# Altium PCB pure_sinus.PcbDoc
Units mm, origin at the board's own origin, x right, y up, seen from the top; angles counter-clockwise.
Board outline 56.22 x 64.53 mm, 2 copper layers (Top Layer, Bottom Layer); 91 components, 60 nets, 314 pads, 56 vias.
Unrouted connection lines stored in the file: 8.
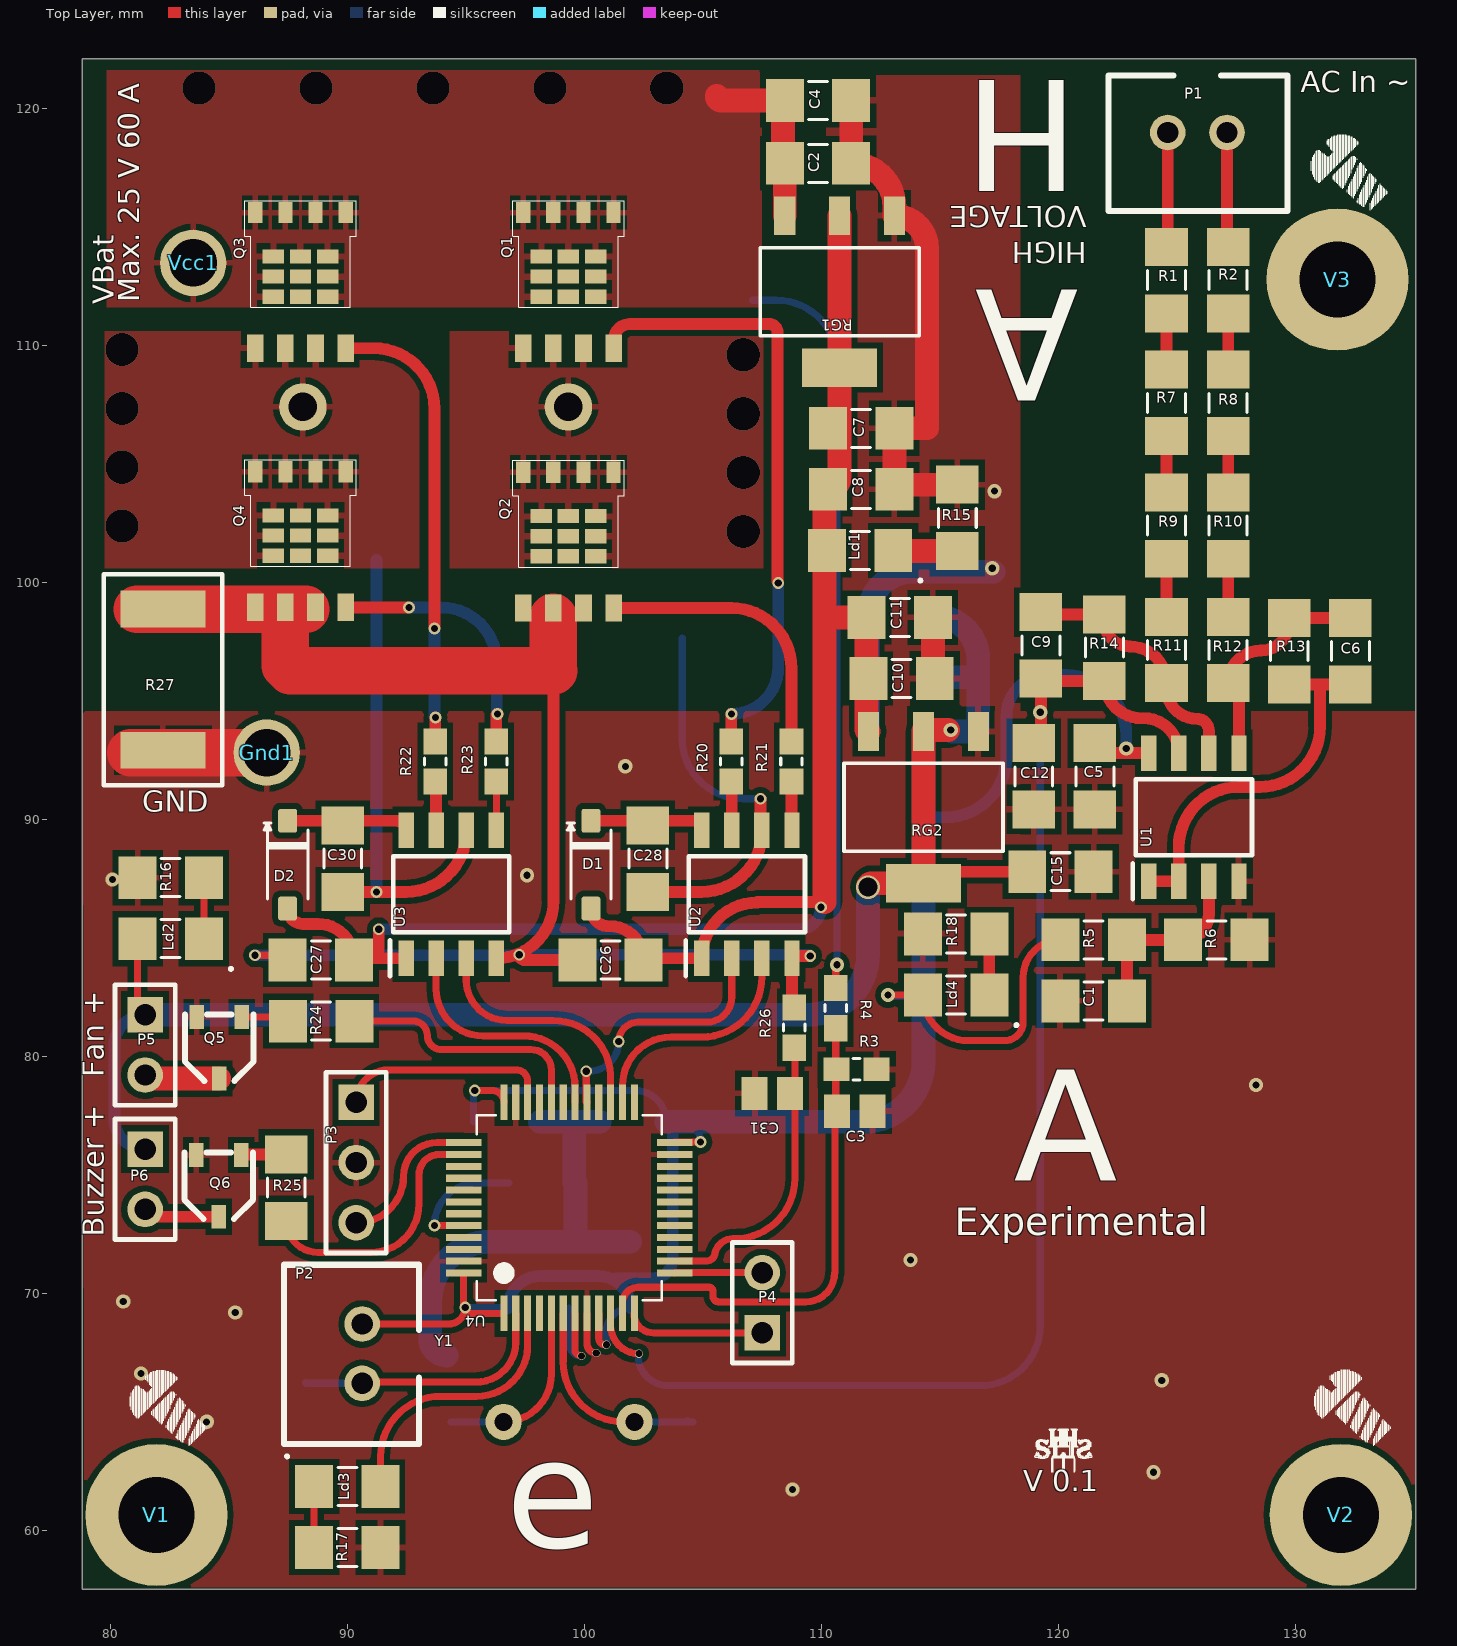
[diagram p0: Top Layer view]
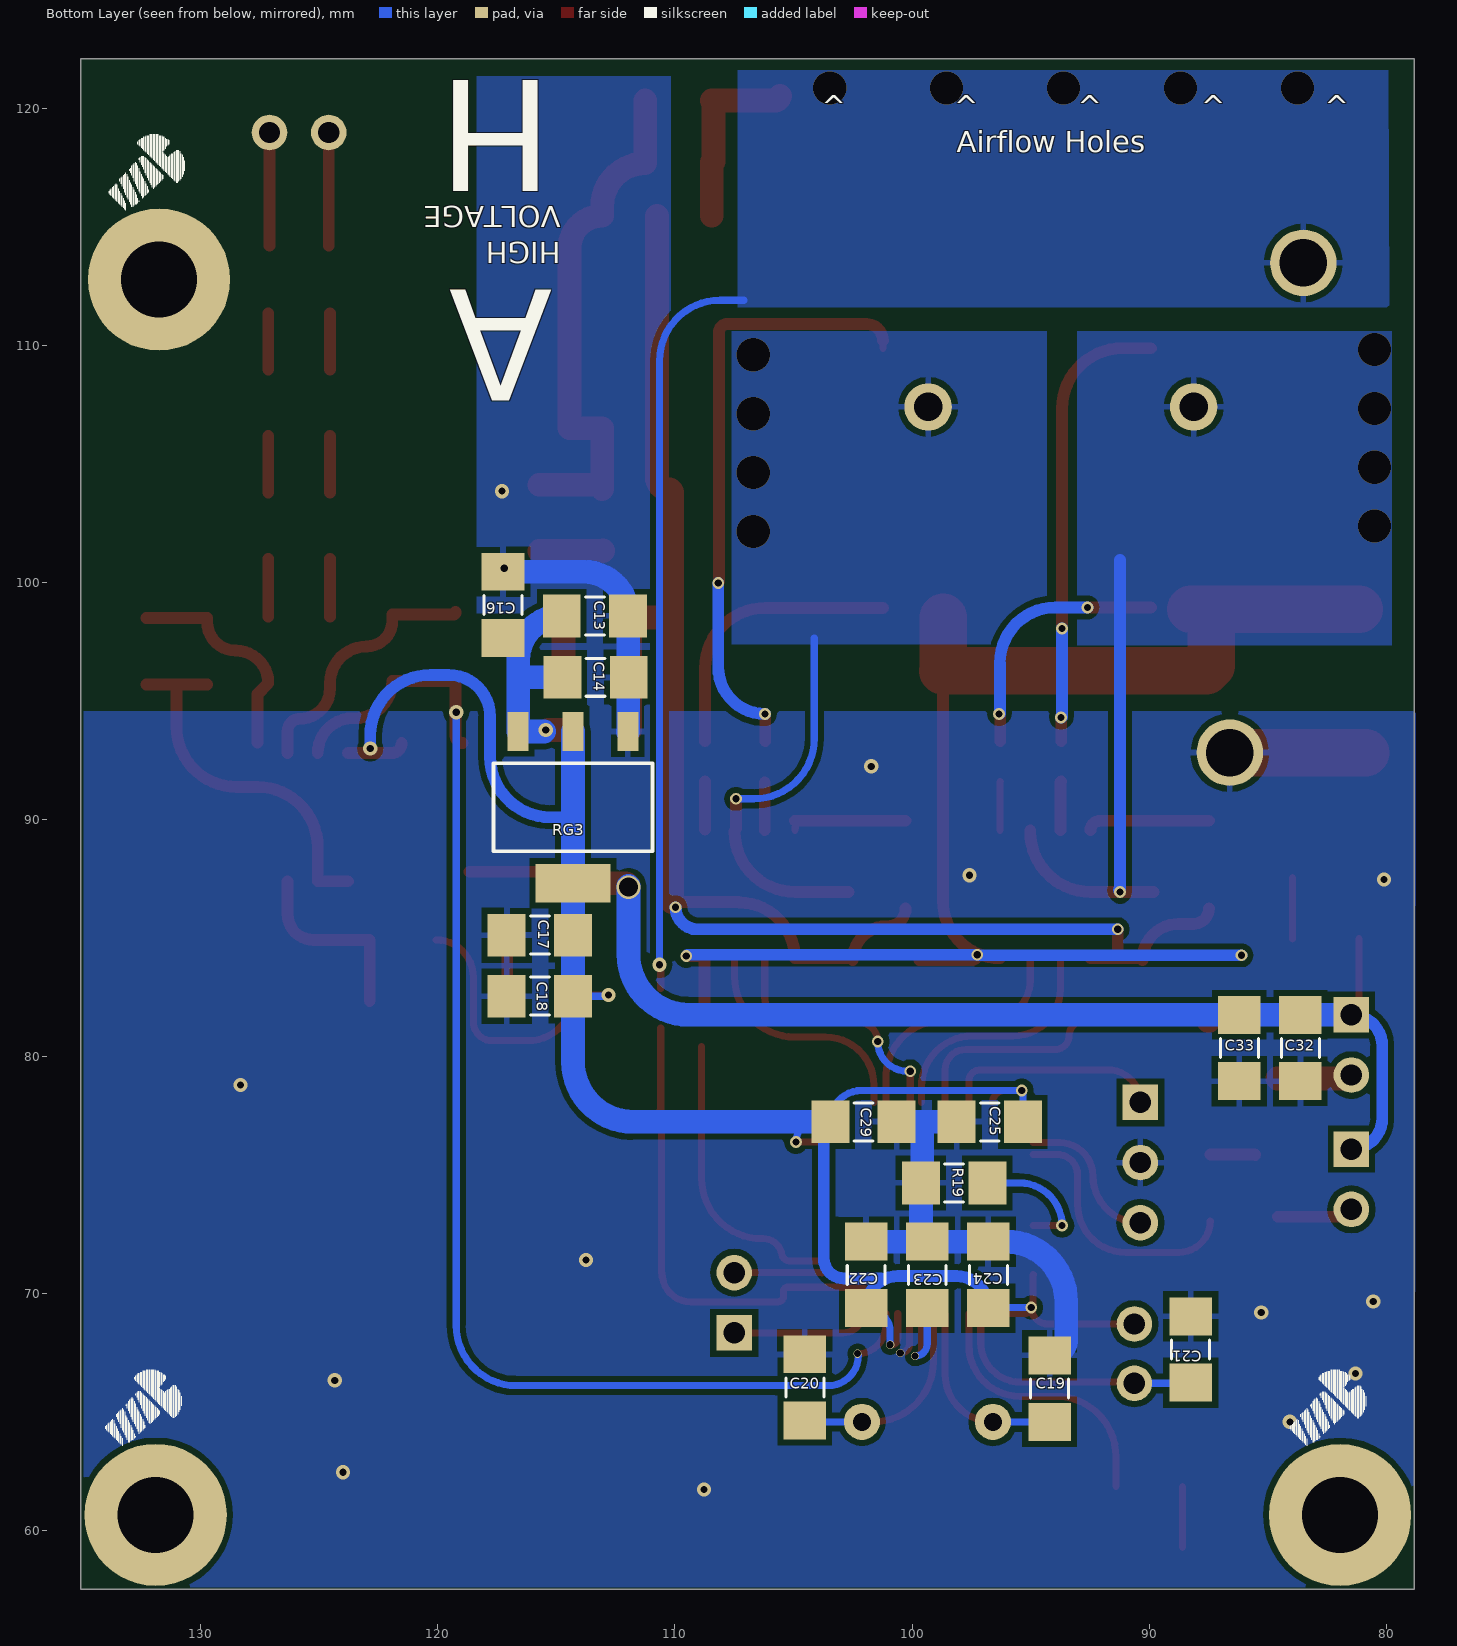
[diagram p1: Bottom Layer view, seen from below]

## Layer stack, top to bottom
Top Solder: solder mask 0.0102, Solder Resist, Dk 3.5
Top Layer: signal copper 0.0356
Dielectric 1: dielectric 0.32, FR-4, Dk 4.8
Bottom Layer: signal copper 0.0356
Bottom Solder: solder mask 0.0102, Solder Resist, Dk 3.5

## Board outline
78.825,57.55 135.05,57.55 135.05,122.075 78.825,122.075

## Design rules (kind name [scope] priority, off if disabled: settings)
Clearance [All] p1: gap=0.254 ignorepadtopadclearanceinfootprint=FALSE except(0: Arc-Hole Track-Hole SMDPad-Hole THPad-Hole Via-Hole Fill-Hole Poly-Hole Region-Hole Text-Hole)
HoleSize [All] p1: absolutevalues=TRUE maxlimit=4 minlimit=0.3 maxpercent=80.000 minpercent=20.000
MinimumSolderMaskSliver [All] p1: minsoldermaskwidth=0.1
PlaneConnect [All] p1: pad.planeconnectstyle=Relief pad.reliefexpansion=0.508 pad.reliefentries=4 pad.reliefconductorwidth=0.254 pad.reliefairgap=0.254 via.planeconnectstyle=Direct via.reliefexpansion=0.508 via.reliefentries=4 via.reliefconductorwidth=0.254 via.reliefairgap=0.254
PolygonConnect [All] p1: thpad.connectstyle=Relief thpad.reliefconductorwidth=0.254 thpad.reliefentries=4 thpad.polygonreliefangle="90 Angle" thpad.airgapwidth=0.254 smdpad.connectstyle=Relief smdpad.reliefconductorwidth=0.254 smdpad.reliefentries=4 smdpad.polygonreliefangle="90 Angle" smdpad.airgapwidth=0.254 via.connectstyle=Direct via.reliefconductorwidth=0.254 via.reliefentries=4 via.polygonreliefangle="90 Angle" via.airgapwidth=0.254
RoutingCorners [All] p1: cornerstyle=Round minsetback=2.54 maxsetback=2.54
RoutingVias [All] p1: holewidth=0.3 width=0.6 viastyle="Through Hole" minholewidth=0.3 minwidth=0.6 maxholewidth=0.711 maxwidth=1.27
SilkToSolderMaskClearance [IsPad] p1: minsilkscreentomaskgap=0.254 clearancetoexposedcopper=FALSE
SolderMaskExpansion [All] p1: expansion=0.102
UnRoutedNet [All] p1: checkbadconnections=TRUE
UnRoutedNet UnRoutedNet_1 [All] p2: checkbadconnections=TRUE
Width [All] p1: maxlimit=4 minlimit=0.3 preferedwidth=0.5 minimp=50.000000 maximp=50.000000 favimp=50.000000
24 further rules are at their usual default settings.

## Components (designator, comment, footprint, x,y, rotation, side; value= is the part's Value field where it differs from the comment)
C1 "4n7" 1206 121.475,82.35 r180 top
C2 "100nF" 1206 109.85,117.675 r180 top
C3 "4n7" C0805 111.4,77.7 r180 top
C4 "1uF" 1206 109.85,120.325 r180 top
C5 "100n" 1206 121.525,91.825 r270 top
C6 "4n7" 1206 132.3,97.1 r270 top
C7 "1uF" 1206 111.673,106.5 r180 top
C8 "100nF" 1206 111.673,103.925 r180 top
C9 "4n7" 1206 119.25,97.35 r90 top
C10 "100nF" 1206 113.375,95.95 r180 top
C11 "1uF" 1206 113.3,98.525 r180 top
C12 "4n7" 1206 118.95,91.825 r90 top
C13 "1uF" 1206 113.375,98.587 r0 bottom
C14 "100nF" 1206 113.35,96 r0 bottom
C15 "100nF" 1206 120.075,87.8 r180 top
C16 "1uF" 1206 117.25,99.05 r270 bottom
C17 "1uF" 1206 115.7,85.125 r180 bottom
C18 "100nF" 1206 115.7,82.55 r180 bottom
C19 "20pF" 1206 94.2,66 r90 bottom
C20 "20pF" 1206 104.525,66.05 r270 bottom
C21 "100nF" 1206 88.25,67.65 r270 bottom
C22 "1uF" 1206 101.935,70.8 r90 bottom
C23 "100nF" 1206 99.36,70.8 r270 bottom
C24 "100nF" 1206 96.785,70.8 r270 bottom
C25 "100nF" 1206 96.725,77.25 r180 bottom
C26 "Cap" 1206 101.1,84.075 r0 top
C27 "Cap" 1206 88.883,84.075 r0 top
C28 "Cap" 1206 102.675,88.35 r90 top
C29 "100nF" 1206 102.05,77.25 r0 bottom
C30 "Cap" 1206 89.808,88.35 r90 top
C31 "100nF" C0805 107.925,78.45 r180 top
C32 "100nF" 1206 83.625,80.365 r90 bottom
C33 "1uF" 1206 86.2,80.365 r90 bottom
D1 "Diode 1N4004" SOD123 100.275,88.1 r270 top
D2 "Diode 1N4004" SOD123 87.483,88.1 r270 top
Gnd1 "M2_pad" M2_Pad 86.6,92.825 r90 top
Ld1 "Mavi" L1206 111.625,101.35 r180 top
Ld2 "Yeşil" L1206 82.553,84.975 r180 top
Ld3 "Sarı" L1206 90,61.875 r0 top
Ld4 "Kırmızı" L1206 115.675,82.6 r180 top
P1 "Header 2" 2p_fml 125.85,118.975 r180 top
P2 "Header 2" 2p_fml 90.625,67.475 r90 top
P3 "Header 3" HDR1X3 90.375,78.075 r270 top
P4 "Header 2" HDR1X2 107.5,68.35 r90 top
P5 "DcFan" HDR1X2 81.475,81.765 r270 top
P6 "Buzzer" HDR1X2 81.475,76.1 r270 top
Q1 "psmn6r5-25" power-so8 99.325,112.6 r0 top
Q2 "psmn6r5-25" power-so8 99.325,101.65 r0 top
Q3 "psmn6r5-25" power-so8 88.025,112.6 r0 top
Q4 "psmn6r5-25" power-so8 88.025,101.675 r0 top
Q5 "BC817" SOT23 84.475,80.25 r0 top
Q6 "BC817" SOT23 84.45,74.425 r0 top
R1 "250k" 1206 124.55,112.75 r270 top
R2 "250k" 1206 127.15,112.75 r270 top
R3 "3k3" 0603 111.475,79.475 r180 top
R4 "8k7" 0603 110.6,82.05 r90 top
R5 "2k2" 1206 121.475,84.925 r180 top
R6 "2k2" 1206 126.65,84.925 r180 top
R7 "250k" 1206 124.55,107.575 r270 top
R8 "250k" 1206 127.15,107.575 r270 top
R9 "250k" 1206 124.55,102.4 r270 top
R10 "250k" 1206 127.15,102.4 r270 top
R11 "250k" 1206 124.55,97.15 r270 top
R12 "250k" 1206 127.15,97.15 r270 top
R13 "4k1" 1206 129.725,97.1 r270 top
R14 "4k1" 1206 121.925,97.25 r90 top
R15 "5k" 1206 115.725,102.725 r90 top
R16 "2.2k" 1206 82.553,87.55 r180 top
R17 "1k" 1206 90,59.3 r0 top
R18 "1k" 1206 115.675,85.175 r180 top
R19 "1k" 1206 98.225,74.675 r0 bottom
R20 "10R" 0603 106.19,92.45 r90 top
R21 "10R" 0603 108.73,92.45 r90 top
R22 "10R" 0603 93.708,92.45 r90 top
R23 "10R" 0603 96.283,92.45 r90 top
R24 "10R" 1206 88.9,81.5 r180 top
R25 "2k2" 1206 87.425,74.475 r90 top
R26 "2K2" 0603 108.855,81.225 r270 top
R27 "Şönt 0.01 Ohm 3W" Shont_2512 82.225,95.9 r270 top
RG1 "LM1117-12v" SOT-223 110.761,112.275 r270 top
RG2 "LM1117-5v" SOT-223 114.3,90.525 r270 top
RG3 "LM1117-3v3" SOT-223 114.3,90.525 r270 bottom
U1 "MCP6022" SOP-8L 125.7,90.1 r90 top
U2 "IR2301" SOP-8L 106.85,86.85 r90 top
U3 "IR2301" SOP-8L 94.383,86.85 r90 top
U4 "STM32F103C8T6" LQFP48 99.355,73.6 r90 top
V1 "M3_Vida" M3_Vida 81.95,60.671 r0 top
V2 "M3_Vida" M3_Vida 131.9,60.675 r0 top
V3 "M3_Vida" M3_Vida 131.76,112.775 r0 top (schematic designator V2)
Vcc1 "M2_pad" M2_Pad 83.5,113.475 r90 top
Y1 "8MHz" xtal 104.88,66.925 r180 top

## Footprints (in the part's own frame and the unit in brackets; to place one, negate y for a bottom-side part, rotate by r counter-clockwise, add the part's x,y. Pads: shape width x height; smd on the part's side, far side on the other; paste and mask are expansions set on the pad)
2p_fml [mm]
  round 1.5 hole 0.9: 1(-1.25,0) 2(1.25,0)
  silkscreen extent -3.81,-2.4 3.75,3.3
0603 [mm]
  rect 1.1x1 smd: 1(-0.85,0) 2(0.85,0)
  silkscreen extent -0.15,-0.45 0.15,0.45
1206 [mm]
  rect 1.6x1.8 smd: 1(-1.4,0) 2(1.4,0)
  silkscreen extent -0.4,-0.8 0.4,0.8
C0805 [mm] "Chip Capacitor, Body 2.0x1.3mm, IPC High Density"
  rect 1.1x1.4 smd: 1(-0.75,0) 2(0.75,0)
  body extent -1.1,-0.72 1.1,0.72, height 1.4
HDR1X2 [mm] "Connector; Header; 2 Position"
  rect 1.5x1.5 hole 0.9: 1(0,0)
  round 1.5 hole 0.9: 2(2.54,0)
  silkscreen extent -1.27,-1.27 3.81,1.27
HDR1X3 [mm] "Connector; Header; 3 Position"
  rect 1.5x1.5 hole 0.9: 1(0,0)
  round 1.5 hole 0.9: 2(2.54,0) 3(5.08,0)
  silkscreen extent -1.27,-1.27 6.35,1.27
L1206 [mm]
  rect 1.6x1.8 smd: 1(-1.4,0) 2(1.4,0)
  silkscreen extent -2.6,-0.8 0.4,1.33
LQFP48 [mm]
  rect 1.5x0.3 smd: 1(-4.425,2.75) 2(-4.425,2.25) 3(-4.425,1.75) 4(-4.425,1.25) 5(-4.425,0.75) 6(-4.425,0.25) 7(-4.425,-0.25) 8(-4.425,-0.75) 9(-4.425,-1.25) 10(-4.425,-1.75) 11(-4.425,-2.25) 12(-4.425,-2.75) 25(4.475,-2.75) 26(4.475,-2.25) 27(4.475,-1.75) 28(4.475,-1.25) 29(4.475,-0.75) 30(4.475,-0.25) 31(4.475,0.25) 32(4.475,0.75) 33(4.475,1.25) 34(4.475,1.75) 35(4.475,2.25) 36(4.475,2.75)
  rect 0.3x1.5 smd: 13(-2.725,-4.45) 14(-2.225,-4.45) 15(-1.725,-4.45) 16(-1.225,-4.45) 17(-0.725,-4.45) 18(-0.225,-4.45) 19(0.275,-4.45) 20(0.775,-4.45) 21(1.275,-4.45) 22(1.775,-4.45) 23(2.275,-4.45) 24(2.775,-4.45) 37(2.775,4.45) 38(2.275,4.45) 39(1.775,4.45) 40(1.275,4.45) 41(0.775,4.45) 42(0.275,4.45) 43(-0.225,4.45) 44(-0.725,4.45) 45(-1.225,4.45) 46(-1.725,4.45) 47(-2.225,4.45) 48(-2.725,4.45)
  silkscreen extent -3.87,-3.9 3.93,3.9
M2_Pad [mm]
  round 2.8 hole 2: 1(0,0)
M3_Vida [mm]
  round 6 hole 3.2: 0(0,0)
  silkscreen extent -1.1,2.91 2.1,6.11
power-so8 [mm]
  rect 0.7x1.15 smd: 1(-1.905,-2.725) 2(-0.635,-2.725) 3(0.635,-2.725) 4(1.905,-2.725)
  rect 0.6x0.9 smd: 5(1.905,3) 6(0.635,3) 7(-0.635,3) 8(-1.905,3)
  rect 0.9x0.6 smd: 6(-1.15,-0.55) 6(-1.15,0.3) 6(-1.15,1.15) 6(0,-0.55) 6(0,0.3) 6(0,1.15) 6(1.15,-0.55) 6(1.15,0.3) 6(1.15,1.15)
  silkscreen extent -2.35,-1 2.35,3.5
Shont_2512 [mm]
  rect 1.55x3.6 smd: 1(-2.975,0) 2(2.975,0)
  silkscreen extent -4.45,-2.5 4.45,2.5
SOD123 [mm] "SOD-123; 2 Leads; Body 2.7 x 1.6 mm, (LxW)"
  round 0.508 on Mech15: 0(0,0)
  rrect25% 1x0.8 smd: 1(1.85,0) 2(-1.85,0)
  silkscreen extent -1.75,-1 1.45,0.85, body extent -1.95,-0.9 1.95,0.9, height 1.18
SOP-8L [mm] "AP1509-50SG-13"
  rect 1.5x0.65 smd: 1(-2.7,1.905) 2(-2.7,0.635) 3(-2.7,-0.635) 4(-2.7,-1.905) 5(2.7,-1.905) 6(2.7,-0.635) 7(2.7,0.635) 8(2.7,1.905)
  silkscreen extent -3.45,-2.45 1.6,2.58
SOT23 [mm]
  rect 0.6x1 smd: 1(1.077,1.427) 2(-0.823,1.427) 3(0.127,-1.173)
  silkscreen extent -1.32,-1.27 1.58,1.53, body extent -1.32,-1.27 1.58,1.53, height 1.3
SOT-223 [mil]
  rect 64x35 smd: 1(-125.5,91) 2(-125.5,0) 3(-125.5,-91)
  rect 64x125 smd: 4(126.5,0)
  silkscreen extent -73,-132 74,132, body extent 110,-10 110,-10, height 10
xtal [mil]
  round 60 hole 30: 1(108.74,91.54) 2(326.26,91.54)

## Part data
C1 C2 C3 C4 C5 C6 C7 C8 C9 C10 C11 C12 C13 C14 C15 C16 C17 C18 C19 C20 C21 C22 C23 C24 C25 C29 C31 C32 C33: library part Cap
D1 D2: "1 Amp General Purpose Rectifier", Code_JEDEC=DO-204-AL, ComponentLink1Description="Manufacturer Link", ComponentLink1URL=http://www.fairchildsemi.com/, ComponentLink2Description=Datasheet, ComponentLink2URL=http://www.fairchildsemi.com/ds/1N%2F1N4001.pdf, DatasheetVersion=1998, LatestRevisionDate=17-Jul-2002, LatestRevisionNote="Re-released for DXP Platform.", PackageDescription="Diode, Axial; Body 5.2 x 2.7 mm (LxDia. max), Lead Dia. 0.86 mm (max)", PackageReference=DO-41, PackageVersion=Aug-1999, Published=8-Jun-2000, Publisher="Altium Limited"
Ld1 Ld2 Ld3 Ld4: library part Led
P1 P2 P4: "Header, 2-Pin", LatestRevisionDate=17-Jul-2002, LatestRevisionNote="Re-released for DXP Platform.", Publisher="Altium Limited"
P3: "Header, 3-Pin", LatestRevisionDate=17-Jul-2002, LatestRevisionNote="Re-released for DXP Platform.", Publisher="Altium Limited"
P5 P6: library part "Header 2", "Header, 2-Pin", LatestRevisionDate=17-Jul-2002, LatestRevisionNote="Re-released for DXP Platform.", Publisher="Altium Limited"
Q5 Q6: "45 V, 500 mA NPN general-purpose transistors", Supplier Part Number 1=1459035RL, Supplier 1=Farnell
R1 R2 R3 R4 R5 R6 R7 R8 R9 R10 R11 R12 R13 R14 R15 R16 R17 R18 R19 R20 R21 R22 R23 R24 R25 R26: library part Resistor
R27: library part Resistor, "0.01 Ohm / 3W"
RG1 RG2 RG3: library part LM1117
Y1: library part Xtal

## Free pads (board coordinates)
  round 2 hole 1.2: 7(88.125,107.4) M1(99.325,107.4)

## Via types
v1: diameter 0.6, hole 0.3, Top Layer to Bottom Layer, tented both sides, 19 vias
v2: diameter 0.5, hole 0.3, Top Layer to Bottom Layer, tented both sides, 19 vias
v3: diameter 1.4, hole 1.4, Top Layer to Bottom Layer, tented both sides, 13 vias
v4: diameter 0.35, hole 0.3, Top Layer to Bottom Layer, tented both sides, 4 vias
v5: diameter 1, hole 0.8, Top Layer to Bottom Layer, tented both sides, 1 vias

## Nets (pads, with @x,y where several pads share a name; then routed paths per layer and width w, separated by ;. In a path a pad name is that pad's centre, name@x,y a point inside that pad or via, vN(x,y) a via of type N, cw(c..) or ccw(c..) an arc to the next point about the centre after c; other vN are vias at no path point)
+1.65: C6.2 R13.2 U1.1 U1.2 | length 15.9
  Top Layer w0.5: U1.1 U1.2 125.065,88.835 cw(c127.605,88.835) 127.605,91.375 128.485,91.375 ccw(c128.485,93.915) 131.025,93.915 131.025,95.7 ; R13.2 131.025,95.7 ; C6.2 131.025,95.7
+3.3: C5.1 C17.2 C18.2 C22.1 C24.2 C25.2 C29.2 Ld4.2 P2.2 R5.2 RG3.2 RG3.4 U1.8 U4.1 U4.9 U4.24 U4.36 U4.48 | length 99.6
  Top Layer w0.3: P2.2 94.275,68.725 ccw(c94.275,69.425) v2(94.975,69.425) ; U4.48@94.875,70.791 cw(c94.905,70.791) 94.905,70.821 94.905,69.495 ccw(c94.975,69.495) v2(94.975,69.425) ; v2(95.375,78.575) 96.105,78.575 cw(c96.105,78.075) U4.36 ; U4.1@96.551,69.175 95.225,69.175 cw(c95.225,69.425) v2(94.975,69.425) ; U4.9 100.605,68.12 ccw(c100.875,68.12) v4@100.875,67.85 ; U4.24 cw(c103.83,76.375) 103.83,76.4 v2(104.9,76.4) ; v1(112.8,82.6) Ld4.2 ccw(c116.2,82.6) 116.2,80.675 117.714,80.675 ccw(c117.714,81.461) 118.5,81.461 118.5,83.35 cw(c120.075,83.35) R5.2
  Top Layer w0.5: C5.1 ccw(c121.95,93.225) 121.95,92.8 U1.8
  Bottom Layer w0.3: v2(94.975,69.425) 96.76,69.425 cw(c96.76,69.4) C24.2 ; C25.2 95.325,78.525 cw(c95.375,78.525) v2(95.375,78.575) 102.125,78.575 cw(c102.125,77.25) C29.2 ; v4@100.925,67.855 100.925,68.39 cw(c101.935,68.39) C22.1 ; C29.2@104.05,77.25 cw(c104.05,76.4) v2(104.9,76.4) ; v1(112.8,82.6) 112.85,82.55 C18.2
  Bottom Layer w0.5: C24.2 cw(c98.135,69.4) 98.135,70.75 100.585,70.75 cw(c100.585,69.4) C22.1 ; 101.325,70.65 102.875,70.65 ccw(c102.875,71.5) 103.725,71.5 103.725,76.975 ccw(c103.45,76.975) C29.2 ; 114.3,90.1 115.256,90.1 ccw(c115.256,92.64) 117.796,92.64 117.796,94.35 cw(c119.546,94.35) 119.546,96.1 120.31,96.1 cw(c120.31,93.56) 122.85,93.56 v1(122.85,93)
  Bottom Layer w1: C29.2 104.05,77.25 111.76,77.25 ccw(c111.76,79.79) 114.3,79.79 C18.2 C17.2 RG3.4 114.3,90.1 RG3.2
  other v4: 100.925,67.85
+5: C13.2 C14.2 C15.2 C16.2 C32.2 C33.2 Ld2.2 P5.1 P6.1 RG2.2 RG2.4 RG3.3 | length 68.8
  Top Layer w0.3: Ld2.2 81.153,82.087 ccw(c81.475,82.087) P5.1
  Top Layer w0.5: RG2.4 cw(c114.788,87.312) 114.788,87.8 C15.2
  Top Layer w1: v5(111.958,87.15) cw(c112.12,87.15) 112.12,87.312 RG2.4 RG2.2 cw(c114.362,93.713) 114.362,93.775 v1@115.35,93.775
  Bottom Layer w0.5: P6.1 cw(c81.475,77.4) 80.175,77.4 80.175,80.465 cw(c81.475,80.465) P5.1
  Bottom Layer w1: P5.1 C32.2 C33.2 109.418,81.765 ccw(c109.418,84.305) 111.958,84.305 v5(111.958,87.15) v5@111.958,87.2 ; C14.2 116.586,96 cw(c116.586,95.975) 116.611,95.975 ; C13.2 cw(c114.775,96.75) 116.611,96.75 116.611,95.975 ; v1@115.512,93.713 RG3.3 116.611,95.975
  other v1: 115.45,93.775
+12: C7.2 C8.2 C10.2 C11.2 C26.2 C27.2 D1.1 D2.1 Ld1.2 RG1.2 RG1.4 RG2.3 U2.1 U3.1 | length 75.3
  Top Layer w0.5: D2.1 ccw(c88.133,86.25) 88.133,85.6 88.758,85.6 cw(c88.758,84.075) C27.2 cw(c90.358,84.075) 90.358,84.15 91.325,84.15 ; v2(91.325,85.375) 91.325,84.15 ; U3.1 91.325,84.15 ; D1.1 ccw(c101.025,86.25) 101.025,85.5 101.075,85.5 cw(c101.075,84.075) C26.2 cw(c102.575,84.075) 102.575,84.15 U2.1 cw(c107.295,84.15) 107.295,86.5 cw(c107.32,86.5) 107.32,86.525 110.125,86.525
  Top Layer w1: 110.125,86.525 110.125,98.525 ; RG1.2 RG1.4 110.761,104.414 cw(c110.273,104.414) C8.2 ccw(c110.273,103.777) 110.125,103.777 110.125,98.525 ; RG2.3 cw(c111.989,93.801) 111.9,93.801 C11.2 110.125,98.525
  Bottom Layer w0.5: v2(91.325,85.375) 109.25,85.375 ; 109.05,85.375 ccw(c109.05,86.3) v2(109.975,86.3)
+Vbat: C2.2 C4.2 Q1.5 Q1.6 Q1.7 Q1.8 Q3.5 Q3.6 Q3.7 Q3.8 R4.2 RG1.3 Vcc1.1 | length 39.5
  Top Layer w0.3: R4.2@110.6,82.88 R4.2 v1@110.6,83.825 ; v1@110.6,83.9 v1@110.6,83.825 ; v1(110.65,83.875) ccw(c110.65,83.825) v1@110.6,83.825
  Top Layer w1: 105.575,120.525 ccw(c105.775,120.525) 105.775,120.325 C4.2 ccw(c108.45,120.25) 108.375,120.25 108.375,117.75 cw(c108.375,117.675) C2.2 RG1.3
  Bottom Layer w0.3: 107.1,111.9 108.107,111.9 cw(c108.107,109.36) 110.647,109.36 v1@110.647,83.9
  other v3: 83.75,120.85 88.681,120.85 93.613,120.85 98.544,120.85 103.475,120.85
"Ac Out": C9.1 C12.2 R14.1 U1.7 U4.10 | length 57.9
  Top Layer w0.3: U4.10 101.105,68.67 ccw(c102.3,68.67) v4(102.3,67.475)
  Top Layer w0.5: C12.2 ccw(c118.95,93.525) 119.25,93.525 C9.1 ccw(c119.35,95.95) 119.35,95.85 R14.1 ccw(c123.5,95.85) 123.5,94.275 123.59,94.275 cw(c123.59,92.8) U1.7
  Bottom Layer w0.3: v4@102.267,67.4 ccw(c103.542,67.4) 103.542,66.125 116.685,66.125 ccw(c116.685,68.665) 119.225,68.665 v1(119.225,94.525)
Blt_Rst: U4.41
Blt_Rx: U4.43
Blt_Tx: U4.42
Buzzer: R25.1 U4.38 | length 11.1
  Top Layer w0.3: R25.1 ccw(c88.752,73.075) 88.752,71.748 90.996,71.748 ccw(c90.996,73.775) 93.023,73.775 93.023,75.02 cw(c93.878,75.02) 93.878,75.875 U4.38
Ch1: U2.2 U4.29 | length 10.9
  Top Layer w0.3: v2(100.077,79.385) 100.077,78.103 ccw(c100.105,78.103) U4.29 ; v2(101.447,80.635) cw(c102.267,80.635) 102.267,81.455 105.15,81.455 ccw(c105.15,82.52) 106.215,82.52 U2.2
  Bottom Layer w0.3: v2(100.077,79.385) 100.197,79.385 ccw(c100.197,80.635) v2(101.447,80.635)
Ch1N: U2.3 U4.26 | length 10
  Top Layer w0.3: U4.26 101.605,78.786 cw(c103.644,78.786) 103.644,80.825 104.945,80.825 ccw(c104.945,83.365) 107.485,83.365 U2.3
Ch2: U3.2 U4.30 | length 10.2
  Top Layer w0.3: U3.2 93.748,82.852 ccw(c95.725,82.852) 95.725,80.875 97.45,80.875 cw(c97.45,78.72) 99.605,78.72 U4.30
Ch2N: U3.3 U4.27 | length 10.3
  Top Layer w0.3: 95.018,83.234 ccw(c96.727,83.234) 96.727,81.525 98.7,81.525 cw(c98.7,79.12) 101.102,79.24 cw(c98.7,79.12) 101.105,79.12 U4.27 ; 95.018,83.309 U3.3
FanPwm: R24.1 U4.32 | length 10.8
  Top Layer w0.3: R24.1 92.775,81.5 cw(c92.775,80.9) 93.375,80.9 ccw(c93.975,80.9) 93.975,80.3 97.75,80.3 cw(c97.75,79.445) 98.605,79.445 U4.32
GND: C1.2 C2.1 C3.1 C4.1 C5.2 C7.1 C8.1 C10.1 C11.1 C12.1 C13.1 C14.1 C15.1 C16.1 C17.1 C18.1 C19.2 C20.1 C21.1 C22.2 C23.1 C24.1 C25.1 C29.1 C31.2 C32.1 C33.1 Gnd1.1 P3.2 Q5.2 Q6.2 R3.1 R6.1 R15.2 R16.2 R17.2 R18.2 R19.2 R27.2 RG1.1 RG2.1 RG3.1 U1.4 U4.8 U4.23 U4.35 U4.47 | length 64.1
  Top Layer w0.3: U4.8 100.105,67.895 ccw(c100.5,67.895) v4(100.5,67.5)
  Top Layer w1: C4.1 C2.1 cw(c111.25,115.852) 113.073,115.852 RG1.1 cw(c113.073,114.086) 114.45,114.086 114.45,106.5 C7.1 C8.1 cw(c113.273,103.925) 113.273,104.125 R15.2 ; C11.1 114.7,96.025 ccw(c114.775,96.025) C10.1
  Top Layer w2: R27.2@80.875,92.825 Gnd1.1
  Bottom Layer w1: C19.2 cw(c94.2,68.1) 93.5,68.1 93.5,69.66 cw(c96.04,69.66) 96.04,72.2 C24.1 C23.1 ; C25.1 99.575,77.25 ; C29.1 99.575,77.25 ; C22.2 C23.1 ; RG3.1 111.975,93.713 C13.1 cw(c113.838,98.587) 113.838,100.45 C16.1 ; C23.1 ccw(c99.36,72.465) 99.625,72.465 R19.2 cw(c99.625,74.725) 99.575,74.725 99.575,77.25
  other v1: 108.775,61.75 124,62.475 84.069,64.6 124.35,66.35 81.3,66.637 85.275,69.215 80.55,69.675 113.75,71.425 128.325,78.8 80.099,87.475 97.583,87.65 101.725,92.243 117.2,100.6 117.3,103.85
I_Dc: C31.1 R26.2 U4.14 | length 12.7
  Top Layer w0.3: U4.14 105.134,71.375 ccw(c105.134,71.748) 105.479,71.608 ; 105.507,71.748 cw(c105.134,71.748) 105.479,71.608 ; R26.2@108.875,80.425 108.875,74.865 cw(c106.335,74.865) 106.335,72.325 106.275,72.325 ccw(c106.275,71.525) 105.479,71.608
NetC1_1: C1.1 R5.1 R6.2 U1.3 | length 8
  Top Layer w0.5: C1.1 R5.1 R6.2 ccw(c125.25,86.01) 126.335,86.01 U1.3
NetC6_1: C6.1 R12.2 R13.1 U1.5 | length 9.5
  Top Layer w0.5: U1.5@127.605,93.25 127.605,95.295 R12.2 cw(c128.525,95.75) 128.525,97.125 ccw(c128.525,98.325) 129.725,98.325 R13.1 C6.1
NetC9_2: C9.2 R11.2 R14.2 U1.6 | length 11.1
  Top Layer w0.5: C9.2 ccw(c119.35,98.75) 119.35,98.65 R14.2 121.925,98.375 ccw(c123,98.375) 123,97.3 cw(c123,95.75) R11.2 124.55,95.525 ccw(c125.825,95.525) 125.825,94.25 cw(c125.825,93.74) 126.335,93.74 U1.6
NetC19_1: C19.1 U4.5 Y1.2 | length 7.9
  Top Layer w0.3: Y1.2 ccw(c96.593,66.612) 98.605,66.612 U4.5
  Bottom Layer w0.3: C19.1@94.375,64.6 Y1.2
NetC20_2: C20.2 U4.6 Y1.1 | length 9
  Top Layer w0.3: U4.6 99.105,67.14 ccw(c101.645,67.14) 101.645,64.6 Y1.1
  Bottom Layer w0.3: Y1.1 C20.2@104.3,64.6 ; C20.2@104.35,64.65 cw(c104.3,64.65) C20.2@104.3,64.6 ; C20.2@104.575,64.6 C20.2@104.3,64.6
NetC23_2: C23.2 U4.7 | length 4.2
  Top Layer w0.3: U4.7 99.605,67.62 ccw(c99.825,67.62) v4@99.825,67.4
  Bottom Layer w0.3: C23.2 99.36,67.89 ccw(c99.875,67.89) v4(99.875,67.375)
NetC28_1: C28.1 pad.M1 Q1.1 Q1.2 Q1.3 Q2.5 Q2.6 Q2.7 Q2.8 U2.6 | length 16.7
  Top Layer w0.3: U2.6@107.425,89.61 ccw(c107.485,89.61) U2.6 U2.6@107.485,89.49
  Top Layer w0.5: C28.1 104.945,86.95 ccw(c104.945,89.49) U2.6@107.485,89.49 ; U2.6@107.425,89.61 v2(107.425,90.877)
  Bottom Layer w0.3: 104.125,97.65 104.125,93.417 ccw(c106.665,93.417) 106.665,90.877 v2(107.425,90.877)
  other v3: 106.7,102.15 106.7,104.633 106.7,107.117 106.7,109.6
NetC28_2: C28.2 D1.2 U2.8 | length 5.3
  Top Layer w0.3: 104.545,89.95 cw(c104.545,89.55) U2.8
  Top Layer w0.5: D1.2 104.545,89.95 U2.8@104.95,89.95
NetC30_1: C30.1 pad.7 Q3.1 Q3.2 Q3.3 Q4.5 Q4.6 Q4.7 Q4.8 U3.6 | length 20.7
  Top Layer w0.5: C30.1 v2(91.225,86.95) 92.478,86.95 ccw(c92.478,89.49) 95.018,89.49 U3.6
  Bottom Layer w0.5: 91.225,100.952 91.225,87.075 v2@91.275,87.025
  other v3: 80.5,102.375 80.5,104.858 80.5,107.342 80.5,109.825
NetC30_2: C30.2 D2.2 U3.8 | length 5.2
  Top Layer w0.5: D2.2 92.078,89.95 cw(c92.078,89.55) U3.8
NetLd1_1: Ld1.1 R15.1 | length 2.7
  Top Layer w1: Ld1.1 ccw(c113.05,101.35) 113.05,101.325 R15.1
NetLd2_1: Ld2.1 R16.1 | length 2.6
  Top Layer w0.3: Ld2.1 R16.1
NetLd3_1: Ld3.1 R17.1 | length 2.6
  Top Layer w0.3: R17.1 Ld3.1
NetLd4_1: Ld4.1 R18.1 | length 2.6
  Top Layer w0.5: Ld4.1 R18.1
NetP1_1: P1.1 R2.1 | length 4.8
  Top Layer w0.3: R2.1@127.1,114.2 R2.1
  Top Layer w0.5: R2.1@127.1,114.2 P1.1
NetP1_2: P1.2 R1.1 | length 4.8
  Top Layer w0.3: R1.1 R1.1@124.6,114.2
  Top Layer w0.5: R1.1@124.6,114.2 P1.2
NetP5_2: P5.2 Q5.3 | length 3.2
  Top Layer w1: P5.2 ccw(c81.623,79.225) 81.623,79.077 Q5.3
NetP6_2: P6.2 Q6.3 | length 3.3
  Top Layer w0.5: P6.2 ccw(c81.783,73.56) 81.783,73.252 Q6.3
NetQ1_4: Q1.4 R20.2 | length 26.1
  Top Layer w0.3: Q1.4 Q1.4@101.23,110.205
  Top Layer w0.5: Q1.4@101.23,110.205 cw(c101.925,110.205) 101.925,110.9 107.716,110.9 ; R20.2 106.19,94.452 v2(106.2,94.452) ; 107.791,110.9 cw(c107.791,110.541) 108.15,110.541 v2@108.15,100.05
  Bottom Layer w0.5: v2(106.2,94.452) ccw(c106.2,96.427) 108.175,96.427 v2(108.175,99.977)
NetQ2_4: Q2.4 R21.2 | length 12
  Top Layer w0.5: Q2.4 106.19,98.925 cw(c106.19,96.385) 108.73,96.385 R21.2
NetQ3_4: Q3.4 R22.2 | length 19.2
  Top Layer w0.5: Q3.4 91.135,109.875 cw(c91.135,107.335) 93.675,107.335 v2@93.675,98.125 ; R22.2 93.708,94.3 v2(93.725,94.3)
  Bottom Layer w0.5: v2(93.675,98.05) 93.675,94.35 ccw(c93.725,94.35) v2(93.725,94.3)
NetQ4_4: Q4.4 R23.2 | length 11
  Top Layer w0.5: Q4.4 v2(92.6,98.95) ; R23.2 96.283,94.405 cw(c96.328,94.405) v2(96.328,94.45)
  Bottom Layer w0.5: v2(92.6,98.95) 93.95,98.95 cw(c93.95,96.6) 96.3,96.6 v2@96.3,94.475
NetQ5_1: Q5.1 R24.2 | length 2
  Top Layer w0.3: Q5.1 R24.2@87.323,81.677
  Top Layer w1: R24.2@87.323,81.677 cw(c87.323,81.5) R24.2
NetQ6_1: Q6.1 R25.2 | length 1.9
  Top Layer w0.5: Q6.1 cw(c85.55,75.852) 85.55,75.875 R25.2
NetR1_2: R1.2 R7.1 | length 2.4
  Top Layer w0.5: R7.1 R1.2
NetR2_2: R2.2 R8.1 | length 2.4
  Top Layer w0.5: R8.1 R2.2
NetR7_2: R7.2 R9.1 | length 2.4
  Top Layer w0.5: R9.1 R7.2
NetR8_2: R8.2 R10.1 | length 2.4
  Top Layer w0.5: R10.1 R8.2
NetR9_2: R9.2 R11.1 | length 2.4
  Top Layer w0.5: R11.1 R9.2
NetR10_2: R10.2 R12.1 | length 2.4
  Top Layer w0.5: R12.1 R10.2
NetR19_1: R19.1 U4.44 | length 5.4
  Top Layer w0.3: v2(93.675,72.875) U4.44
  Bottom Layer w0.3: v2(93.675,72.875) cw(c95.475,72.875) 95.475,74.675 R19.1
NetR20_1: R20.1 U2.7 | length 2.1
  Top Layer w0.3: R20.1 cw(c106.19,91.575) R20.1@106.215,91.575
  Top Layer w0.5: U2.7 R20.1@106.215,91.575
NetR21_1: R21.1 U2.5 | length 2.1
  Top Layer w0.3: U2.5@108.73,89.575 ccw(c108.755,89.575) U2.5
  Top Layer w0.5: U2.5@108.73,89.575 R21.1
NetR22_1: R22.1 U3.7 | length 2.1
  Top Layer w0.5: R22.1 cw(c93.708,91.56) 93.748,91.56 U3.7
NetR23_1: R23.1 U3.5 | length 2.1
  Top Layer w0.3: R23.1 96.288,91.6 U3.5
RunLed: Ld3.2 U4.3 | length 11.5
  Top Layer w0.3: Ld3.2 91.4,63.135 cw(c93.94,63.135) 93.94,65.675 95.455,65.675 ccw(c95.455,67.825) 97.605,67.825 U4.3
Start/Stop: C21.2 P2.1 U4.2 | length 11.1
  Top Layer w0.3: P2.1 cw(c90.675,66.225) 90.675,66.275 95.425,66.275 ccw(c95.425,67.955) 97.105,67.955 U4.2
  Bottom Layer w0.3: C21.2 ccw(c88.275,66.25) 88.275,66.225 P2.1
SWDCLK: P3.3 U4.37 | length 6.5
  Top Layer w0.3: P3.3 90.395,72.995 ccw(c90.395,74.975) 92.375,74.975 cw(c93.775,74.975) 93.775,76.375 U4.37
SWDIO: P3.1 U4.34 | length 9.2
  Top Layer w0.3: P3.1 cw(c91.745,78.075) 91.745,79.445 97.125,79.445 cw(c97.125,78.965) 97.605,78.965 U4.34
Temp1: P4.2 U4.13 | length 3.7
  Top Layer w0.3: U4.13 103.805,70.89 P4.2
Temp2: P4.1 U4.12 | length 5.8
  Top Layer w0.3: U4.12@102.084,69.175 ccw(c102.909,69.175) 102.909,68.35 P4.1@107.425,68.35
V_Dc: C3.2 R3.2 R4.1 U4.11 | length 20.6
  Top Layer w0.3: U4.11 101.605,69.605 cw(c102.275,69.605) 102.275,70.275 105.266,70.275 cw(c105.266,70.125) 105.416,70.125 105.416,69.911 ccw(c105.668,69.911) 105.668,69.66 109.275,69.66 ; 109.335,69.66 ccw(c109.335,70.875) 110.55,70.875 ; 110.575,70.875 C3.2@110.575,77.1 ; R4.1 110.6,77.75 ccw(c110.65,77.75) C3.2
Vss: C26.1 C27.1 Q2.1 Q2.2 Q2.3 Q4.1 Q4.2 Q4.3 R26.1 R27.1 U2.4 U3.4 | length 66.7
  Top Layer w0.3: v2@86.145,84.275 C27.1@87.483,84.275
  Top Layer w0.5: U3.4 ccw(c96.288,86.562) v2@97.225,84.34 ; 98.7,96.275 98.7,86.562 cw(c96.288,86.562) v2@97.225,84.34 ; C26.1 97.49,84.075 cw(c97.49,84.34) v2@97.225,84.34 ; R26.1 cw(c108.855,82.175) 108.755,82.175 U2.4 cw(c108.855,84.15) 108.855,84.25 v2(109.525,84.25)
  Top Layer w2: R27.1@81.15,98.875 R27.1 88.251,98.875 ; Q4.2@87.39,98.6 87.39,96.485 87.6,96.275 98.7,96.275 98.69,96.285 Q2.2@98.69,98.525
  Bottom Layer w0.5: v2(86.105,84.275) v2@97.252,84.275 ; v2(97.252,84.3) v2@109.475,84.3
pads on no net: D1.0 D2.0 U4.4 U4.15 U4.16 U4.17 U4.18 U4.19 U4.20 U4.21 U4.22 U4.25 U4.28 U4.31 U4.33 U4.39 U4.40 U4.45 U4.46 V1.0 V2.0 V3.0

## Polygon pours and split planes (outlines as drawn)
GND on Top Layer (solid, pour order 32): 110.2,121.4 118.383,121.4 118.383,86.8 110.2,86.8
GND on Top Layer (solid, pour order 24): 78.869,94.575 135.025,94.575 135.025,57.625 78.912,57.625
no net on Top Layer (solid, pour order 22): 79.75,121.275
NetC28_1 on Top Layer "Top Layer-No Net" (solid, pour order 6): 94.325,100.6 94.325,110.6 107.55,110.6 107.55,100.6
NetC30_1 on Top Layer "Top Layer-NetC30_1" (solid, pour order 4): 79.775,100.6 79.775,110.6 93.025,110.6 93.025,100.6
+Vbat on Top Layer "Top Layer-+Vbat 1" (solid, pour order 0): 79.85,111.6 79.85,121.6 107.475,121.6 107.475,111.6
GND on Top Solder (solid, pour order 36): 78.9,94.6 78.943,94.557 88.55,94.557 88.55,91.075 88.525,91.05 78.89,91.05
no net on Top Solder (solid): 82.975,110.6 ccw(c83,110.6) 83,110.575 90.325,110.575 cw(c90.325,110.525) 90.375,110.525 90.375,109.35 91.7,109.35 cw(c91.7,108.025) 93.025,108.025 93.025,100.6 ccw(c92.975,100.6) 92.975,100.65 82.975,100.65
no net on Top Solder "Top Layer-No Net" (solid, pour order 14): 94.325,100.6 94.325,110.6 104.325,110.6 104.325,100.6
no net on Top Solder (solid, pour order 10): 82.975,111.6 82.975,121.6 94.275,121.6 94.275,111.6
no net on Top Solder (solid, pour order 8): 94.275,111.6 94.275,121.6 104.275,121.6 104.275,111.6
GND on Bottom Layer (solid, pour order 34): 110.175,121.35 118.358,121.35 118.358,86.75 110.175,86.75
no net on Bottom Layer (solid, pour order 28): 114.725,105.425
GND on Bottom Layer (solid, remove dead copper, pour order 26): 78.769,94.575 134.925,94.575 134.925,57.625 78.812,57.625
NetC28_1 on Bottom Layer "Top Layer-No Net" (solid, pour order 18): 94.325,97.4 94.325,110.6 107.6,110.6 107.6,97.4
NetC30_1 on Bottom Layer "Top Layer-NetC30_1" (solid, pour order 20): 79.775,97.35 79.775,110.6 93.025,110.6 93.025,97.35
+Vbat on Bottom Layer "Bottom Layer-+Vbat" (solid, pour order 12): 79.912,121.6 107.35,121.6 107.35,111.6 79.887,111.6

## Silkscreen, mask and mechanical layers (free items; w line width, h text height)
Top Overlay:
  drawing of 418 lines, arcs and shapes, not listed
  text "H" at 120.851,122.724 h8 r180
  text "AC In ~" at 130.2,120.375 h1.52
  text "HIGH / VOLTAGE" at 121.192,116.165 h1.52 r180
  text "A" at 120.851,113.879 h8 r180
  text "Max. 25 V 60 A" at 81.525,111.826 h1.52 r90
  text "VBat" at 80.45,111.725 h1.52 r90
  text "GND" at 81.35,90.025 h1.52
  text "Fan +" at 80.025,79.125 h1.52 r90
  text "A" at 118.104,73.221 h8
  text "Buzzer +" at 80.025,72.4 h1.52 r90
  text "Experimental" at 115.62,72.073 h2
  text "V 0.1" at 118.499,61.375 h1.52
  text "e" at 96.679,57.756 h8
Bottom Overlay:
  text "H" at 115.148,122.724 h8 r180
  text "^            ^           ^           ^           ^ /                Airflow Holes" at 103.8,117.85 h1.52
  text "HIGH / VOLTAGE" at 114.807,116.165 h1.52 r180
  text "A" at 115.148,113.879 h8 r180
Top Solder:
  lines w2: 82.25,98.925 87.415,98.925 88.276,98.925 ; 87.415,96.535 87.415,98.65 ; 87.625,96.325 98.725,96.325 ; 98.715,96.335 98.715,98.575